# Altium PCB ProtoStack_Codec.PcbDoc
Units mm, origin at the board's own origin, x right, y up, seen from the top; angles counter-clockwise.
Board outline 39.67 x 122.17 mm, 2 copper layers (Top Layer, Bottom Layer); 79 components, 57 nets, 366 pads, 183 vias.
Unrouted connection lines stored in the file: 1.
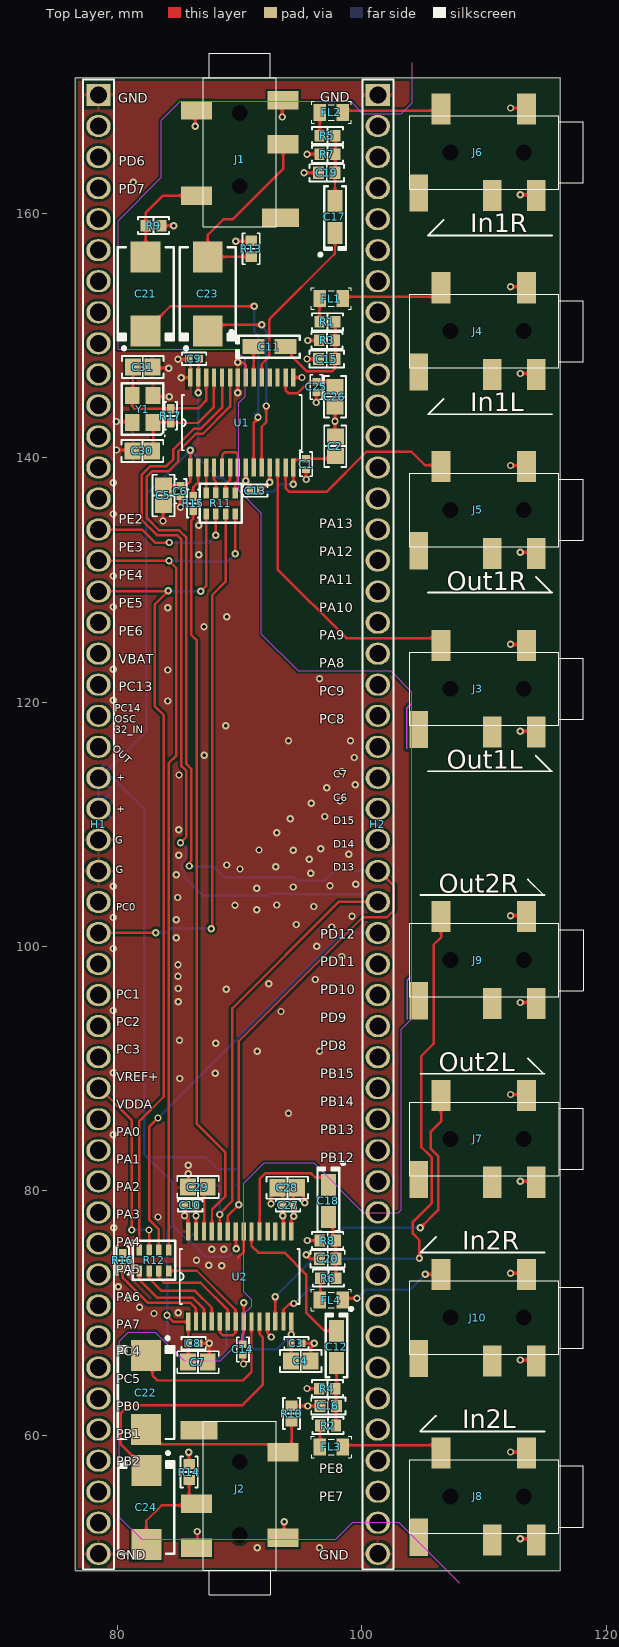
[diagram p0: Top Layer view]
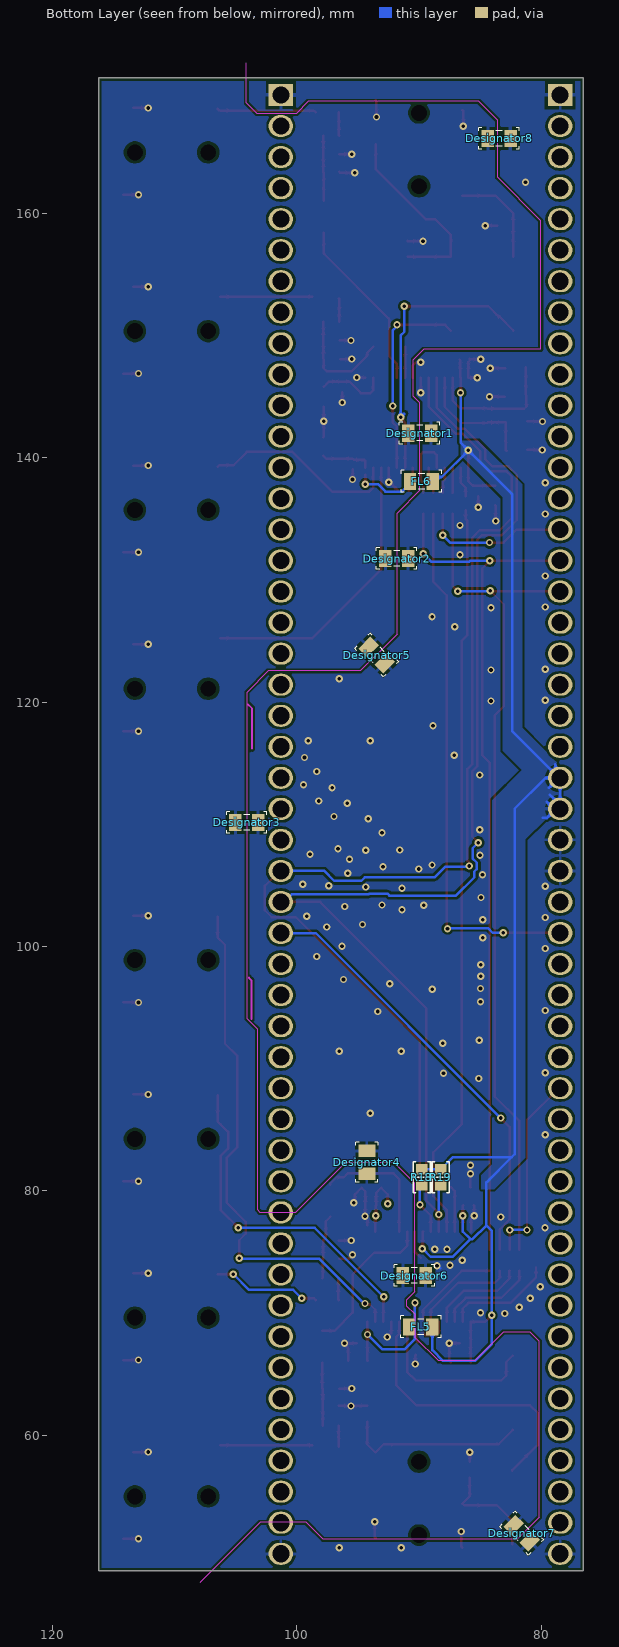
[diagram p1: Bottom Layer view, seen from below]

## Layer stack, top to bottom
Top Solder: solder mask 0.0102, Solder Resist, Dk 3.5
Top Layer: signal copper 0.0356
Dielectric 1: dielectric 0.32, FR-4, Dk 4.8
Bottom Layer: signal copper 0.0356
Bottom Solder: solder mask 0.0102, Solder Resist, Dk 3.5

## Board outline
76.54,48.914 76.54,171.086 116.205,171.086 116.205,48.914

## Design rules (kind name [scope] priority, off if disabled: settings)
BoardOutlineClearance [All] p1: gap=0.254 ignorepadtopadclearanceinfootprint=FALSE except(0: Arc-SplitContinuation Track-SplitContinuation SMDPad-SplitContinuation THPad-SplitContinuation Via-SplitContinuation Fill-SplitContinuation Poly-SplitContinuation Region-SplitContinuation Text-SplitContinuation)
Clearance [All] p1: gap=0.203 ignorepadtopadclearanceinfootprint=TRUE except(0.254: Arc-Hole Track-Hole SMDPad-Hole THPad-Via THPad-Hole Via-Via Via-Hole Fill-Hole Poly-Hole Region-Hole Text-Hole)
ComponentClearance [All] p1 off: gap=0.254 collisioncheckmode=3 verticalgap=0.254 showdistances=FALSE
PolygonConnect [All] p1: thpad.connectstyle=Relief thpad.reliefconductorwidth=0.254 thpad.reliefentries=4 thpad.polygonreliefangle="90 Angle" thpad.airgapwidth=0.254 smdpad.connectstyle=Relief smdpad.reliefconductorwidth=0.254 smdpad.reliefentries=4 smdpad.polygonreliefangle="90 Angle" smdpad.airgapwidth=0.254 via.connectstyle=Direct via.reliefconductorwidth=0.254 via.reliefentries=4 via.polygonreliefangle="90 Angle" via.airgapwidth=0.254
RoutingVias [All] p1: holewidth=0.3 width=0.6 viastyle="Through Hole" minholewidth=0.3 minwidth=0.6 maxholewidth=0.3 maxwidth=0.6
SilkToSilkClearance [All] p1 off: silktosilkclearance=0.254
SilkToSolderMaskClearance [IsPad] p1 off: minsilkscreentomaskgap=0.254 clearancetoexposedcopper=TRUE
SolderMaskExpansion [All] p1: expansion=0.102 istentingtop=FALSE
Width [All] p1: maxlimit=1.524 minlimit=0.203 preferedwidth=0.203
27 further rules are at their usual default settings.

## Classes and differential pairs
net class PowerNet: +3V3_CODEC
component class ProtoStack_Codec: C1 C2 C3 C4 C5 C6 C7 C8 C9 C10 C11 C12 C13 C14 C15 C16 C17 C18 C19 C20 C21 C22 C23 C24 C25 C26 C27 C28 C29 C30 C31 FL1 FL2 FL3 FL4 FL5 FL6 H1 H2 J1 J2 J3 J4 J5 J6 J7 J8 J9 J10 R1 R2 R3 R4 R5 R6 R7 R8 R9 R10 R11 R12 R13 R14 R15 R16 R17 R18 R19 U1 U2 Y1

## Components (designator, comment, footprint, x,y, rotation, side; value= is the part's Value field where it differs from the comment)
C1 "0.1µF" "CAP 0402_1005" 95.428,139.489 r90 top
C2 "10µF" "CAP 0805_2012" 97.815,140.957 r270 top
C3 "0.1µF" "CAP 0402_1005" 94.632,67.539 r180 top
C4 "10µF" "CAP 0805_2012" 94.992,66.091 r180 top
C5 "10µF" "CAP 0805_2012" 83.744,136.919 r90 top
C6 "0.1µF" "CAP 0402_1005" 85.141,137.279 r90 top
C7 "10µF" "CAP 0805_2012" 86.576,65.989 r180 top
C8 "0.1µF" "CAP 0402_1005" 86.216,67.539 r180 top
C9 "0.1µF" "CAP 0402_1005" 86.258,148.107 r180 top
C10 "0.1µF" "CAP 0402_1005" 85.945,78.816 r180 top
C11 "10µF" "CAP POL 1206_3216" 92.416,149.098 r0 top
C12 "10µF" "CAP POL 1206_3216" 97.917,67.248 r270 top
C13 "0.1µF" "CAP 0402_1005" 91.27,137.312 r180 top
C14 "0.1µF" "CAP 0402_1005" 90.246,67.031 r90 top
C15 "220pF" "CAP 0603_1608" 97.115,148.082 r0 top
C16 "220pF" "CAP 0603_1608" 97.241,62.408 r0 top
C17 "10µF" "CAP POL 1206_3216" 97.79,159.726 r90 top
C18 "10µF" "CAP POL 1206_3216" 97.257,79.186 r270 top
C19 "220pF" "CAP 0603_1608" 97.115,163.322 r0 top
C20 "220pF" "CAP 0603_1608" 97.191,74.447 r0 top
C21 "47µF" "CAP POL 2917_7343" 82.296,153.416 r90 top
C22 "47µF" "CAP POL 2917_7343" 82.321,63.502 r270 top
C23 "47µF" "CAP POL 2917_7343" 87.376,153.416 r90 top
C24 "47µF" "CAP POL 2917_7343" 82.347,54.1 r270 top
C25 "0.1µF" "CAP 0402_1005" 96.266,145.796 r270 top
C26 "10µF" "CAP 0805_2012" 97.79,144.996 r270 top
C27 "0.1µF" "CAP 0402_1005" 93.946,78.816 r0 top
C28 "10µF" "CAP 0805_2012" 93.891,80.264 r0 top
C29 "9pF" "CAP 0805_2012" 86.576,80.315 r180 top
C30 "9pF" "CAP 0805_2012" 82.029,140.564 r180 top
C31 "9pF" "CAP 0805_2012" 82.055,147.422 r0 top
Designator1 "Comment" 0805_IND 89.941,142.011 r180 bottom
Designator2 "Comment" 0805_IND 91.821,131.75 r180 bottom
Designator3 "Comment" 0805_IND 104.089,110.16 r180 bottom
Designator4 "Comment" 0805_IND 94.259,82.347 r270 bottom
Designator5 "Comment" 0805_IND 93.451,123.861 r45 bottom
Designator6 "Comment" 0805_IND 90.373,73.076 r180 bottom
Designator7 "Comment" 0805_IND 81.585,51.994 r225 bottom
Designator8 "Comment" 0805_IND 83.439,166.141 r0 bottom
FL1 "BLM21PG221SN1D" 0805_IND 97.485,153.035 r0 top
FL2 "BLM21PG221SN1D" 0805_IND 97.485,168.275 r0 top
FL3 "BLM21PG221SN1D" 0805_IND 97.485,59.055 r0 top
FL4 "BLM21PG221SN1D" 0805_IND 97.485,71.069 r0 top
FL5 "BLM21PG221SN1D" 0805_IND 89.84,68.885 r0 bottom
FL6 "BLM21PG221SN1D" 0805_IND 89.789,138.074 r0 bottom
H1 "RoundedHeader" HeaderDtack_48 78.439,169.691 r270 top
H2 "RoundedHeader" HeaderDtack_48 101.299,169.691 r270 top
J1 "" PJ_327 89.992,163.951 r270 top
J2 "" PJ_327 89.992,56.114 r90 top
J3 "" PJ_327 108.966,121.102 r180 top
J4 "" PJ_327 108.966,150.366 r180 top
J5 "" PJ_327 108.966,135.734 r180 top
J6 "" PJ_327 108.966,164.998 r180 top
J7 "" PJ_327 108.966,84.266 r180 top
J8 "" PJ_327 108.966,55.002 r180 top
J9 "" PJ_327 108.966,98.898 r180 top
J10 "" PJ_327 108.966,69.634 r180 top
R1 "5.6 kOhms" "RES 0603_1608" 97.17,151.13 r0 top
R2 "5.6 kOhms" "RES 0603_1608" 97.221,60.808 r0 top
R3 "5.6 kOhms" "RES 0603_1608" 97.14,149.606 r0 top
R4 "5.6 kOhms" "RES 0603_1608" 97.166,63.83 r0 top
R5 "5.6 kOhms" "RES 0603_1608" 97.17,166.37 r0 top
R6 "5.6 kOhms" "RES 0603_1608" 97.246,72.873 r0 top
R7 "5.6 kOhms" "RES 0603_1608" 97.17,164.846 r0 top
R8 "5.6 kOhms" "RES 0603_1608" 97.191,75.946 r0 top
R9 "47 kOhms" "RES 0603_1608" 82.946,159.004 r0 top
R10 "47 kOhms" "RES 0603_1608" 94.234,61.783 r90 top
R11 "YC164-JR-0733RL" "RESNET 1206-8 CONVEX" 88.443,136.271 r90 top
R12 "YC164-JR-0733RL" "RESNET 1206-8 CONVEX" 82.982,74.32 r270 top
R13 "47 kOhms" "RES 0603_1608" 90.932,157.114 r90 top
R14 "47 kOhms" "RES 0603_1608" 85.852,56.998 r90 top
R15 "100 Ohms" "RES 0402_1005" 86.182,136.271 r270 top
R16 "100 Ohms" "RES 0402_1005" 80.416,74.32 r90 top
R17 "100 Ohms" "RES 0402_1005" 84.353,143.434 r90 top
R18 "5.6 kOhms" "RES 0603_1608" 89.764,81.128 r270 bottom
R19 "5.6 kOhms" "RES 0603_1608" 88.214,81.128 r270 bottom
U1 "WM8731" TSSOP-28 90.17,142.875 r90 top
U2 "WM8731" TSSOP-28 89.992,73 r90 top
Y1 "24.576MHz" "ABRACON ABM8G" 82.051,143.993 r90 top

## Footprints (in the part's own frame and the unit in brackets; to place one, negate y for a bottom-side part, rotate by r counter-clockwise, add the part's x,y. Pads: shape width x height; smd on the part's side, far side on the other; paste and mask are expansions set on the pad)
0805_IND [mil]
  rect 40x55 smd: 1(-37,0) 2(37,0)
  silkscreen extent -65,-35 65,35, body extent -39,-21 39,21, height 49
"ABRACON ABM8G" [mm] "Crystal, 4-Leads, Body 2.50x3.20mm, Pitch 2.20mm, IPC Medium Density"
  rect 1.4x1.2 smd: 1(-1.1,-0.85) 2(1.1,-0.85) 3(1.1,0.85) 4(-1.1,0.85)
  silkscreen extent -2.25,-1.85 2.1,1.7, body extent -1.61,-1.26 1.61,1.26, height 0.6
"CAP 0402_1005" [mm] "Chip Capacitor, 2-Leads, Body 1.02x0.51mm, IPC Medium Density"
  rect 0.6x0.64 smd: 1(-0.44,0) 2(0.44,0)
  silkscreen extent -1,-0.5 1,0.5, body extent -0.5,-0.26 0.5,0.26, height 0.52
"CAP 0603_1608" [mm] "Chip Capacitor, 2-Leads, Body 1.60x0.80mm, IPC Medium Density"
  rect 0.9x1 smd: 1(-0.675,0) 2(0.675,0)
  silkscreen extent -1.4,-0.7 1.4,0.7, body extent -0.8,-0.41 0.8,0.41, height 0.82
"CAP 0805_2012" [mm] "Chip Capacitor, 2-Leads, Body 2.00x1.20mm, IPC Medium Density"
  rect 1.3x1.4 smd: 1(-0.8,0) 2(0.8,0)
  silkscreen extent -1.7,-0.9 1.7,0.9, body extent -1,-0.64 1,0.64, height 1.26
"CAP POL 1206_3216" [mm] "Molded Capacitor, 2-Leads, Body 3.20x1.6mm, IPC Medium Density"
  rect 1.8x1.23 smd: 1(-1.31,0) 2(1.31,0)
  silkscreen extent -3.22,-0.9 2.5,1.32, body extent -1.72,-0.85 1.71,0.85, height 1.7
"CAP POL 2917_7343" [mm] "Molded Capacitor, 2-Leads, Body 7.30x4.30mm, IPC Medium Density"
  rect 2.55x2.45 smd: 1(-3.025,0) 2(3.025,0)
  silkscreen extent -4.57,-2.3 3.8,2.3, body extent -3.65,-2.15 3.65,2.15, height 4.1
HeaderDtack_48 [mm]
  rect 1.8x2 hole 1.4: 1(0,0)
  oval 1.8x2 hole 1.4: 2(2.54,0) 3(5.08,0) 4(7.62,0) 5(10.16,0) 6(12.7,0) 7(15.24,0) 8(17.78,0) 9(20.32,0) 10(22.86,0) 11(25.4,0) 12(27.94,0) 13(30.48,0) 14(33.02,0) 15(35.56,0) 16(38.1,0) 17(40.64,0) 18(43.18,0) 19(45.72,0) 20(48.26,0) 21(50.8,0) 22(53.34,0) 23(55.88,0) 24(58.42,0) 25(60.96,0) 26(63.5,0) 27(66.04,0) 28(68.58,0) 29(71.12,0) 30(73.66,0) 31(76.2,0) 32(78.74,0) 33(81.28,0) 34(83.82,0) 35(86.36,0) 36(88.9,0) 37(91.44,0) 38(93.98,0) 39(96.52,0) 40(99.06,0) 41(101.6,0) 42(104.14,0) 43(106.68,0) 44(109.22,0) 45(111.76,0) 46(114.3,0) 47(116.84,0) 48(119.38,0)
  silkscreen extent -1.27,-1.27 120.65,1.27
PJ_327 [mil]
  rect 60x100 smd mask+3: 2(98.43,-139.76) 3(-177.17,-139.76) 4(-208.66,139.76) 5(-66.93,139.76)
  rect 60x120 smd mask+3: 6(170,131.34)
  round 0 hole 51 unplated mask+3: 257(-168.22,0) 258(68,0)
  silkscreen extent -360,-118 199,118, body extent -374,-177 374,177, height 201
"RES 0402_1005" [mm] "Chip Resistor, 2-Leads, Body 1.0x0.5mm, IPC Medium Density"
  rect 0.75x0.6 smd: 1(-0.575,0) 2(0.575,0)
  silkscreen extent -1.14,-0.51 1.14,0.51, body extent -0.5,-0.25 0.5,0.25, height 0.35
"RES 0603_1608" [mm] "Chip Resistor, 2-Leads, Body 1.60x0.80mm, IPC Medium Density"
  rect 0.85x0.95 smd: 1(-0.65,0) 2(0.65,0)
  silkscreen extent -1.27,-0.7 1.27,0.7, body extent -0.8,-0.4 0.8,0.4, height 0.45
"RESNET 1206-8 CONVEX" [mm] "4 resistor 3.20x1.60mm, 0.7mm high"
  rect 0.9x0.45 smd: 1(-0.85,1.2) 2(-0.85,0.4) 3(-0.85,-0.4) 4(-0.85,-1.2) 5(0.85,-1.2) 6(0.85,-0.4) 7(0.85,0.4) 8(0.85,1.2)
  silkscreen extent -1.6,-1.73 1.6,1.73, body extent -0.84,-1.62 0.84,1.63, height 0.71
TSSOP-28 [mil]
  rect 58x14 smd mask+2.36: 1(-145,166) 2(-145,141) 3(-145,115) 4(-145,90) 5(-145,64) 6(-145,38) 7(-145,13) 8(-145,-13) 9(-145,-38) 10(-145,-64) 11(-145,-90) 12(-145,-115) 13(-145,-141) 14(-145,-166) 15(145,-166) 16(145,-141) 17(145,-115) 18(145,-90) 19(145,-64) 20(145,-38) 21(145,-13) 22(145,13) 23(145,38) 24(145,64) 25(145,90) 26(145,115) 27(145,141) 28(145,166)
  silkscreen extent -89,-193 89,193, body extent -127,-177 127,177, height 44

## Part data
C1 C3 C6 C8 C9 C10 C13 C14 C25 C27: library part C0402C104K4RACAUTO, "CAP CER 0.1UF 16V X7R 0402", Device Package="0402 (1005 Metric)", Manufacturer=KEMET, Operating Temperature="-55°C ~ 125°C", Ratings=AEC-Q200, Supplier Part Number 1=399-6828-1-ND, Temperature Coefficient=X7R, Tolerance=±10%, Voltage - Rated=16V, Applications="Automotive, Bypass, Decoupling", Capacitance=0.1µF, ComponentLink1Description=Datasheet, ComponentLink1URL=https://api.kemet.com/component-edge/download/specsheet/C0402C104K4RACAUTO.pdf, ComponentLink2Description="DigiKey Link", ComponentLink2URL=http://digikey.com/product-detail/en/kemet/C0402C104K4RACAUTO/399-6828-1-ND/3314343, LastUpdated="9/2/2020 1:02:21 AM", Lifecycle Status=Active, Minimum Order=1, Mounting Type="Surface Mount, MLCC", Package / Case="0402 (1005 Metric)", Packaging=TapeAndReel, Part Number=C0402C104K4RACAUTO, Part Status=Active, PartId=3024, Price=0.01, Series="SMD Auto X7R", Size / Dimension="0.039\" L x 0.020\" W (1.00mm x 0.50mm)", Supplier 1=DigiKey, Thickness (Max)="0.022\" (0.55mm)"
C2 C4 C5 C7 C26 C28: library part C0805C106K8PACTU, "CAP CER 10UF 10V X5R 0805", Device Package="0805 (2012 Metric)", Manufacturer=KEMET, Operating Temperature="-55°C ~ 85°C", Supplier Part Number 1=399-4925-1-ND, Temperature Coefficient=X5R, Tolerance=±10%, Voltage - Rated=10V, Applications="General Purpose", Capacitance=10µF, ComponentLink1Description=Datasheet, ComponentLink1URL=https://api.kemet.com/component-edge/download/datasheet/C0805C106K8PACTU.pdf, ComponentLink2Description="DigiKey Link", ComponentLink2URL=http://digikey.com/product-detail/en/kemet/C0805C106K8PACTU/399-4925-1-ND/1090920, LastUpdated="9/2/2020 1:04:14 AM", Lifecycle Status=Active, Minimum Order=1, Mounting Type="Surface Mount, MLCC", Package / Case="0805 (2012 Metric)", Packaging=TapeAndReel, Part Number=C0805C106K8PACTU, Part Status=Active, PartId=15978, Price=0.03, Series="SMD Comm X5R", Size / Dimension="0.079\" L x 0.049\" W (2.00mm x 1.25mm)", Supplier 1=DigiKey, Thickness (Max)="0.055\" (1.40mm)"
C11 C12 C17 C18: library part T491A106K010AT, "CAP TANT 10UF 10% 10V 1206", Device Package="1206 (3216 Metric)", ESR (Equivalent Series Resistance)=3.8Ohm, Lifetime @ Temp.="2000 Hrs @ 125°C", Manufacturer=KEMET, Manufacturer Size Code=A, Operating Temperature="-55°C ~ 125°C", Supplier Part Number 1=399-3684-1-ND, Tolerance=±10%, Voltage - Rated=10V, Capacitance=10µF, ComponentLink1Description=Datasheet, ComponentLink1URL=https://api.kemet.com/component-edge/download/datasheet/T491A106K010AT.pdf, ComponentLink2Description="DigiKey Link", ComponentLink2URL=http://digikey.com/product-detail/en/kemet/T491A106K010AT/399-3684-1-ND/819009, Features="General Purpose", Height - Seated (Max)="0.071\" (1.80mm)", LastUpdated="9/2/2020 1:15:58 AM", Lifecycle Status=Active, Minimum Order=1, Mounting Type="Surface Mount", Package / Case="1206 (3216 Metric)", Packaging=TapeAndReel, Part Number=T491A106K010AT, Part Status=Active, PartId=330, Price=0.07, Series=T491, Size / Dimension="0.126\" L x 0.063\" W (3.20mm x 1.60mm)", Supplier 1=DigiKey, Type=Molded
C15 C16 C19 C20: library part C0603C221K5RACTU, "CAP CER 220PF 50V X7R 0603", Device Package="0603 (1608 Metric)", Manufacturer=KEMET, Operating Temperature="-55°C ~ 125°C", Supplier Part Number 1=399-1071-1-ND, Temperature Coefficient=X7R, Tolerance=±10%, Voltage - Rated=50V, Applications="Bypass, Decoupling", Capacitance=220pF, ComponentLink1Description=Datasheet, ComponentLink1URL=https://api.kemet.com/component-edge/download/datasheet/C0603C221K5RACTU.pdf, ComponentLink2Description="DigiKey Link", ComponentLink2URL=http://digikey.com/product-detail/en/kemet/C0603C221K5RACTU/399-1071-1-ND/411346, LastUpdated="9/2/2020 1:03:33 AM", Lifecycle Status=Active, Minimum Order=1, Mounting Type="Surface Mount, MLCC", Package / Case="0603 (1608 Metric)", Packaging=TapeAndReel, Part Number=C0603C221K5RACTU, Part Status=Active, PartId=3639, Price=0.01, Series="SMD Comm X7R", Size / Dimension="0.063\" L x 0.031\" W (1.60mm x 0.80mm)", Supplier 1=DigiKey, Thickness (Max)="0.034\" (0.87mm)"
C21 C22 C23 C24: library part 293D476X9010D2TE3, "CAP TANT 47UF 10% 10V 2917", Device Package="2917 (7343 Metric)", ESR (Equivalent Series Resistance)=700mOhm, Manufacturer="Vishay Sprague", Manufacturer Size Code=D, Operating Temperature="-55°C ~ 125°C", Supplier Part Number 1=718-1088-1-ND, Tolerance=±10%, Voltage - Rated=10V, Capacitance=47µF, ComponentLink1Description=Datasheet, ComponentLink1URL=http://www.vishay.com/docs/40002/293d.pdf, ComponentLink2Description="DigiKey Link", ComponentLink2URL=http://digikey.com/product-detail/en/vishay-sprague/293D476X9010D2TE3/718-1088-1-ND/1559582, Features="General Purpose", Height - Seated (Max)="0.122\" (3.10mm)", LastUpdated="9/2/2020 1:16:14 AM", Lifecycle Status=Active, Minimum Order=1, Mounting Type="Surface Mount", Package / Case="2917 (7343 Metric)", Packaging=TapeAndReel, Part Number=293D476X9010D2TE3, Part Status=Active, PartId=2778, Price=0.22, Series="TANTAMOUNT®, 293D", Size / Dimension="0.287\" L x 0.169\" W (7.30mm x 4.30mm)", Supplier 1=DigiKey, Type=Molded
C29 C30 C31: library part CBR08C909CAGAC, "CAP CER 9PF 250V C0G/NP0 0805", Device Package="0805 (2012 Metric)", Manufacturer=KEMET, Operating Temperature="-55°C ~ 125°C", Supplier Part Number 1=399-8711-1-ND, Temperature Coefficient="C0G, NP0", Tolerance=±0.25pF, Voltage - Rated=250V, Applications="RF, Microwave, High Frequency", Capacitance=9pF, ComponentLink1Description=Datasheet, ComponentLink1URL=https://api.kemet.com/component-edge/download/datasheet/CBR08C909CAGAC.pdf, ComponentLink2Description="DigiKey Link", ComponentLink2URL=http://digikey.com/product-detail/en/kemet/CBR08C909CAGAC/399-8711-1-ND/3480335, Features="High Q, Low Loss, Ultra Low ESR", LastUpdated="9/2/2020 1:04:31 AM", Lifecycle Status=Active, Minimum Order=1, Mounting Type="Surface Mount, MLCC", Package / Case="0805 (2012 Metric)", Packaging=TapeAndReel, Part Number=CBR08C909CAGAC, Part Status=Active, PartId=8592, Price=0.28, Series="CBR-SMD RF C0G", Size / Dimension="0.079\" L x 0.049\" W (2.00mm x 1.25mm)", Supplier 1=DigiKey, Thickness (Max)="0.035\" (0.88mm)"
FL1 FL2 FL3 FL4 FL5 FL6: "ACM Series 0805 360 Ohm 220mA 500 mOhm DCR 50 V SMT Common Mode Filter"
H1 H2: library part HeaderStack_48
J1 J2 J3 J4 J5 J6 J7 J8 J9 J10: library part "3.5mm jack stereo smd", "Conn 3.5MM Stereo Jack F 3 POS Solder RA SMD 3 Terminal 1 Port T/R", Package=None, Availability=Good, MF=Switchcraft, MP=35RASMT2BHNTRX, Price="0.84 USD", SnapEDA_Link=https://www.snapeda.com/parts/35RASMT2BHNTRX/Switchcraft%20Inc./view-part/?ref=snap
R1 R2 R3 R4 R5 R6 R7 R8 R18 R19: library part RT0603DRE075K6L, "RES SMD 5.6K OHM 0.5% 1/10W 0603", Device Package="0603 (1608 Metric)", Manufacturer=Yageo, Operating Temperature="-55°C ~ 155°C", Power (Watts)="0.1W, 1/10W", Supplier Device Package=0603, Supplier Part Number 1=311-2635-1-ND, Temperature Coefficient=±50ppm/°C, Tolerance=±0.5%, ComponentLink1Description=Datasheet, ComponentLink1URL=https://www.yageo.com/upload/media/product/productsearch/datasheet/rchip/PYu-RT_1-to-0.01_RoHS_L_11.pdf, ComponentLink2Description="DigiKey Link", ComponentLink2URL=http://digikey.com/product-detail/en/yageo/RT0603DRE075K6L/311-2635-1-ND/6129054, Composition="Thin Film", Height - Seated (Max)="0.022\" (0.55mm)", LastUpdated="9/2/2020 1:10:05 AM", Lifecycle Status=Active, Minimum Order=1, Number of Terminations=2, Package / Case="0603 (1608 Metric)", Packaging=TapeAndReel, Part Number=RT0603DRE075K6L, Part Status=Active, PartId=14197, Price=0.01, Resistance="5.6 kOhms", Series=RT, Size / Dimension="0.063\" L x 0.031\" W (1.60mm x 0.80mm)", Supplier 1=DigiKey
R9 R10 R13 R14: library part RT0603FRE0747KL, "RES SMD 47K OHM 1% 1/10W 0603", Device Package="0603 (1608 Metric)", Manufacturer=Yageo, Operating Temperature="-55°C ~ 155°C", Power (Watts)="0.1W, 1/10W", Supplier Device Package=0603, Supplier Part Number 1=YAG3355CT-ND, Temperature Coefficient=±50ppm/°C, Tolerance=±1%, ComponentLink1Description=Datasheet, ComponentLink1URL=https://www.yageo.com/upload/media/product/productsearch/datasheet/rchip/PYu-RT_1-to-0.01_RoHS_L_11.pdf, ComponentLink2Description="DigiKey Link", ComponentLink2URL=http://digikey.com/product-detail/en/yageo/RT0603FRE0747KL/YAG3355CT-ND/5418060, Composition="Thin Film", Height - Seated (Max)="0.022\" (0.55mm)", LastUpdated="9/2/2020 1:10:23 AM", Lifecycle Status=Active, Minimum Order=1, Number of Terminations=2, Package / Case="0603 (1608 Metric)", Packaging=TapeAndReel, Part Number=RT0603FRE0747KL, Part Status=Active, PartId=5674, Price=0.01, Resistance="47 kOhms", Series=RT, Size / Dimension="0.063\" L x 0.031\" W (1.60mm x 0.80mm)", Supplier 1=DigiKey
R11 R12: "RES ARRAY 4 RES 33 OHM 1206", Manufacturer=Yageo, Number of Resistors=4, Operating Temperature="-55°C ~ 155°C", Package / Case="1206 (3216 Metric), Convex, Long Side Terminals", Power Per Element=62.5mW, Resistance (Ohms)=33, Supplier Part Number 1=YC164J-33CT-ND, Temperature Coefficient=±200ppm/°C, Tolerance=±5%, Applications="DDRAM, SDRAM", Circuit Type=Isolated, ComponentLink1Description=Datasheet, ComponentLink1URL=https://www.yageo.com/upload/media/product/productsearch/datasheet/rchip/PYu-YC_TC_group_51_RoHS_L_9.pdf, ComponentLink2Description="DigiKey Link", ComponentLink2URL=http://digikey.com/product-detail/en/yageo/YC164-JR-0733RL/YC164J-33CT-ND/1005642, Height - Seated (Max)="0.028\" (0.70mm)", LastUpdated="9/2/2020 1:23:24 AM", Lifecycle Status=Active, Minimum Order=1, Mounting Type="Surface Mount", Number of Pins=8, Packaging=TapeAndReel, Part Number=YC164-JR-0733RL, Part Status=Active, PartId=145, Price=0.01, Series=YC164, Size / Dimension="0.126\" L x 0.063\" W (3.20mm x 1.60mm)", Supplier 1=DigiKey
R15 R16 R17: library part RT0402FRE07100RL, "RES SMD 100 OHM 1% 1/16W 0402", Device Package="0402 (1005 Metric)", Manufacturer=Yageo, Operating Temperature="-55°C ~ 155°C", Power (Watts)="0.063W, 1/16W", Supplier Device Package=0402, Supplier Part Number 1=YAG3342CT-ND, Temperature Coefficient=±50ppm/°C, Tolerance=±1%, ComponentLink1Description=Datasheet, ComponentLink1URL=https://www.yageo.com/upload/media/product/productsearch/datasheet/rchip/PYu-RT_1-to-0.01_RoHS_L_11.pdf, ComponentLink2Description="DigiKey Link", ComponentLink2URL=http://digikey.com/product-detail/en/yageo/RT0402FRE07100RL/YAG3342CT-ND/5418047, Composition="Thin Film", Height - Seated (Max)="0.014\" (0.35mm)", LastUpdated="9/2/2020 1:08:09 AM", Lifecycle Status=Active, Minimum Order=1, Number of Terminations=2, Package / Case="0402 (1005 Metric)", Packaging=TapeAndReel, Part Number=RT0402FRE07100RL, Part Status=Active, PartId=3193, Price=0.01, Resistance="100 Ohms", Series=RT, Size / Dimension="0.039\" L x 0.020\" W (1.00mm x 0.50mm)", Supplier 1=DigiKey
U1 U2: "Stero in/ot audio codec"
Y1: library part ABM8G-24.576MHZ-B4Y-T, "CRYSTAL 24.5760MHZ 10PF SMD", Device Package="4-SMD, No Lead", ESR (Equivalent Series Resistance)="60 Ohms", Frequency Stability=±30ppm, Load Capacitance=10pF, Manufacturer="Abracon LLC", Operating Mode=Fundamental, Operating Temperature="-20°C ~ 70°C", Supplier Part Number 1=535-10296-1-ND, ComponentLink1Description=Datasheet, ComponentLink1URL=https://abracon.com/Resonators/ABM8G.pdf, ComponentLink2Description="DigiKey Link", ComponentLink2URL=http://digikey.com/product-detail/en/abracon-llc/ABM8G-24.576MHZ-B4Y-T/535-10296-1-ND/2218109, Frequency=24.576MHz, Frequency Tolerance=±30ppm, Height - Seated (Max)="0.039\" (1.00mm)", LastUpdated="3/19/2020 10:36:25 PM", Lifecycle Status=Active, Minimum Order=1, Mounting Type="Surface Mount", Package / Case="4-SMD, No Lead", Packaging=TapeAndReel, Part Number=ABM8G-24.576MHZ-B4Y-T, Part Status=Active, PartId=297, Price=0.50, Series=ABM8G, Size / Dimension="0.126\" L x 0.098\" W (3.20mm x 2.50mm)", Supplier 1=DigiKey, Type="MHz Crystal"

## Via types
v1: diameter 0.6, hole 0.3, Top Layer to Bottom Layer, tented both sides, 183 vias

## Nets (pads, with @x,y where several pads share a name; then routed paths per layer and width w, separated by ;. In a path a pad name is that pad's centre, name@x,y a point inside that pad or via, vN(x,y) a via of type N, cw(c..) or ccw(c..) an arc to the next point about the centre after c; other vN are vias at no path point)
+3V3_CODEC: C1.2 C2.2 C3.2 C4.2 C13.2 C14.2 FL5.2 FL6.2 U1.8 U1.14 U2.8 U2.14 | length 25.7
  Top Layer w0.203: C14.2@90.094,67.64 90.195,67.742 90.195,68.25 90.322,68.377 90.322,69.312 U2.8@90.327,69.312 ; U2.8 v1(90.322,70.841) ; U1.8@90.487,139.205 U1.8 v1(90.5,138.125) 90.807,137.818 90.807,137.336 C13.2 ; C4.2 94.209,66.107 v1(94.209,68.25) U2.14 ; v1(94.386,137.846) U1.14@94.386,138.633 ; U1.14 94.386,139.751 94.463,139.827 95.326,139.827 C1.2 97.587,139.929 C2.2
  Bottom Layer w0.203: v1(90.322,70.841) 90.322,67.894 91.186,67.031 92.989,67.031 v1(94.209,68.25) ; v1(90.5,138.125) 91.389,137.236 92.735,137.236 93.345,137.846 v1(94.386,137.846)
+3V3_D: C5.2 C6.2 C7.2 C8.2 C9.1 C10.1 FL5.1 FL6.1 H1.23 H1.24 R18.1 R19.1 U1.1 U1.27 U2.1 U2.22 U2.27 | length 138.2
  Top Layer w0.203: C5.2 C6.2 85.598,137.719 85.954,138.074 U1.1 v1(85.954,140.614) ; v1(84.049,69.825) 84.582,69.291 85.7,69.291 85.725,69.317 U2.1 C8.2 C7.2 ; C10.1 86.398,78.803 86.398,77.991 v1(86.411,77.978) U2.27 ; v1(86.589,145.313) U1.27 86.627,146.596 86.627,147.993 C9.1@86.665,148.031 ; U2.22 89.687,76.657 89.687,75.311 v1(89.713,75.286)
  Bottom Layer w0.203: 78.84,114.935 78.84,114.212 H1.23 ; 79.273,112.42 79.132,112.279 79.121,112.279 H1.24@78.439,111.597 ; 79.362,112.988 H1.23@78.539,113.811 ; 79.547,111.853 78.965,111.271 H1.24@78.783,111.271 ; 79.858,110.541 79.513,110.541 H1.24@78.783,111.271 ; v1(86.411,77.978) 86.411,76.683 85.784,76.056 ; v1(86.589,145.313) 86.589,141.249 v1(85.954,140.614) ; FL6.1 88.511,138.413 88.155,138.413 v1(85.954,140.614) ; FL5.1 88.9,66.98 88.011,66.091 85.395,66.091 84.049,67.437 v1(84.049,69.825) 84.049,76.759 84.48,77.191 ; v1(89.713,75.286) 89.027,74.6 87.24,74.6 85.784,76.056 ; R18.1 R19.1 87.213,82.779 82.398,82.779 ; H1.24@78.439,111.597 H1.23 ; H1.24@78.439,111.597 H1.24 H1.24@78.783,111.271 ; H1.23 H1.23@78.539,113.811 ; H1.23@78.539,113.811 82.347,117.619 82.347,137.008 v1(85.954,140.614) ; H1.23@78.539,113.811 79.636,113.811 82.169,111.277 82.169,83.007 82.398,82.779 ; 82.398,82.779 84.48,80.696 84.48,77.191 ; 84.48,77.191 85.615,76.056 85.784,76.056
GND: C5.1 C6.1 C7.1 C8.1 C9.2 C10.2 C29.2 C30.2 C31.2 Designator1.2 Designator2.2 Designator3.2 Designator4.1 Designator5.1 Designator6.2 Designator7.2 Designator8.1 H1.1 H1.25 H1.26 H1.48 H2.1 H2.48 U1.21 U1.22 U1.28 U2.21 U2.28 Y1.2 Y1.4 | length 22.4
  Top Layer w0.203: v1(79.881,142.975) Y1.4@81.119,142.975 ; v1(79.91,140.646) C30.2@81.147,140.646 ; C31.2@82.937,147.339 v1(84.174,147.339) ; Y1.2@82.983,145.01 v1(84.22,145.01) ; v1(83.718,134.823) 83.718,136.093 C5.1 ; v1(84.938,148.057) 85.768,148.057 C9.2 ; v1(85.141,135.966) C6.1 ; v1(85.217,146.558) U1.28 85.954,147.862 C9.2@85.785,148.031 ; C10.2 85.488,78.799 85.488,77.995 v1(85.471,77.978) 85.725,77.724 85.725,76.733 U2.28 ; C29.2 85.783,80.321 v1(85.783,81.408) ; C8.1 v1(87.503,67.539) 87.503,66.116 C7.1 ; v1(89.84,145.313) U1.22 ; v1(89.84,147.828) 89.874,147.794 90.255,147.794 90.5,147.549 U1.21 ; 89.865,74.549 90.322,75.006 U2.21 ; v1@91.542,107.899 v1(91.567,107.899) ; v1(92.939,106.528) 92.964,106.553 v1@92.989,106.553 ; v1@93.015,103.378 v1(93.015,103.403) ; v1(93.015,109.322) v1@93.04,109.296 ; v1@94.336,104.877 v1(94.361,104.877) ; v1(94.361,107.874) v1@94.361,107.899 ; v1(96.291,100.025) 96.342,100.076 v1@96.52,100.076 ; v1(96.622,108.001) v1@96.647,108.001 ; v1(97.536,101.6) v1@97.561,101.6
  Bottom Layer w0.203: 88.265,73.66 88.494,73.889 v1(88.519,73.889) ; v1@97.307,105.029 97.333,105.029 v1(97.384,104.978)
  other v1: 91.44,50.8 96.52,50.8 82.982,69.977 84.963,70.028 81.788,70.485 80.899,71.222 80.061,72.161 87.452,73.914 86.462,74.32 87.706,75.235 88.697,75.235 79.68,76.987 83.312,77.876 85.776,82.093 79.654,84.607 93.98,86.36 85.095,89.205 87.986,89.637 79.654,89.687 91.44,91.44 96.52,91.44 88.036,92.1 85.065,92.329 93.37,94.691 79.654,94.767 84.963,95.479 88.9,96.52 84.963,96.571 92.38,96.952 96.164,97.307 84.938,97.561 84.938,98.501 98.349,99.187 79.654,99.847 84.787,100.736 94.615,101.803 84.787,102.184 79.654,102.387 99.187,102.489 91.389,103.022 96.063,103.276 89.611,103.378 84.912,104.013 91.389,104.775 79.654,104.927 99.492,105.105 84.791,105.885 95.809,105.994 90.018,106.35 88.921,106.68 95.682,107.137 84.993,107.467 98.908,107.569 85.014,109.55 94.132,110.465 96.952,110.642 95.86,111.735 98.196,111.912 97.104,113.005 99.441,113.233 85.019,114.046 98.349,114.325 99.365,115.468 87.097,115.646 93.98,116.84 99.06,116.84 88.849,118.085 84.096,120.098 79.654,120.167 96.52,121.92 84.096,122.638 79.654,122.707 87.071,126.162 88.921,127 84.096,127.718 79.654,127.787 79.654,130.327 86.635,132.08 86.638,134.468 79.654,135.407 79.654,137.947 81.28,162.56
GND_A: C1.1 C2.1 C3.1 C4.1 C13.1 C14.1 C15.1 C16.1 C19.1 C20.1 C25.2 C26.2 C27.2 C28.2 Designator1.1 Designator2.1 Designator3.1 Designator4.2 Designator5.2 Designator6.1 Designator7.1 Designator8.2 J1.3 J1.4 J2.3 J2.4 J3.3 J3.4 J4.3 J4.4 J5.3 J5.4 J6.3 J6.4 J7.3 J7.4 J8.3 J8.4 J9.3 J9.4 J10.3 J10.4 R3.1 R4.1 R7.1 R8.1 R9.2 R10.2 R13.2 R14.2 U1.11 U1.15 U2.11 U2.15 | length 54.8
  Top Layer w0.203: R9.2 v1(84.582,159.004) ; v1(85.827,58.623) 85.827,57.851 R14.2@85.852,57.825 ; v1(86.36,167.132) 86.36,168.369 J1.3 ; J2.4 86.524,50.896 v1(86.524,52.134) ; v1(89.662,157.734) 90.902,157.734 R13.2 ; C14.1 90.297,66.54 v1(90.297,65.837) ; C13.1 91.71,137.332 92.376,137.998 v1(92.456,137.998) U1.11 ; U2.11 92.278,68.377 92.583,68.072 v1(92.583,68.047) ; v1(93.472,167.894) 93.472,169.181 J1.4 ; J2.3 93.624,51.696 v1(93.624,52.934) ; U2.15@94.209,77.191 94.209,77.625 94.412,77.828 v1(94.412,77.927) 94.399,77.94 94.399,78.803 C27.2 94.386,79.959 C28.2 95.239,79.716 95.239,79.239 95.326,79.152 v1(95.326,79.045) ; R10.2 94.259,62.408 v1(95.55,62.408) C16.1 ; U1.15 94.463,146.571 v1(95.086,146.571) ; C3.1 v1(96.088,67.539) 96.088,67.431 95.792,67.135 C4.1 ; v1(95.25,163.322) C19.1 C19.1@96.52,163.402 ; v1(95.428,74.778) 95.431,74.778 95.761,74.447 C20.1 ; v1(95.428,138.227) C1.1 ; v1(95.5,63.83) R4.1 ; v1(95.504,148.082) C15.1 ; v1(95.504,164.846) R7.1 ; v1(95.525,75.946) R8.1 ; v1(95.554,149.606) R3.1 ; v1(96.266,144.526) C25.2 ; C26.2 v1(97.79,143.002) 97.79,141.707 C2.1@97.815,141.681 ; v1(112.147,58.634) J8.3@113.384,58.634 ; v1(112.147,73.266) J10.3@113.384,73.266 ; v1(112.147,87.898) J7.3@113.384,87.898 ; v1(112.147,102.531) J9.3@113.384,102.531 ; v1(112.147,124.734) J3.3@113.384,124.734 ; v1(112.147,139.366) J5.3@113.384,139.366 ; v1(112.147,153.998) J4.3@113.384,153.998 ; v1(112.147,168.631) J6.3@113.384,168.631 ; v1(112.947,51.534) J8.4@114.184,51.534 ; v1(112.947,66.166) J10.4@114.184,66.166 ; v1(112.947,80.798) J7.4@114.184,80.798 ; v1(112.947,95.431) J9.4@114.184,95.431 ; v1(112.947,117.634) J3.4@114.184,117.634 ; v1(112.947,132.266) J5.4@114.184,132.266 ; v1(112.947,146.898) J4.4@114.184,146.898 ; v1(112.947,161.531) J6.4@114.184,161.531
I2C4_SCL: H2.27 R19.2 U1.24 U2.24 | length 101.3
  Top Layer w0.203: v1(85.141,108.509) 85.623,108.991 85.623,114.368 85.217,114.774 85.217,133.299 84.847,133.669 83.213,133.669 81.991,134.891 81.991,138.624 82.661,139.294 83.972,139.294 84.557,139.878 84.557,140.691 86.228,142.362 86.797,142.362 88.544,144.11 U1.24 ; U2.24 v1(88.367,78.08) 88.367,78.173 89.383,79.189 89.383,94.945 98.088,103.651 H2.27
  Bottom Layer w0.203: v1(85.141,108.509) 85.598,108.052 85.598,107.217 85.263,106.882 85.263,106.344 85.471,106.136 85.471,105.664 86.965,104.17 92.41,104.17 92.583,104.343 94.039,104.343 94.11,104.272 100.403,104.272 101.024,103.651 H2.27 ; R19.2@88.163,80.427 R19.2 88.367,80.325 v1(88.367,78.08)
I2C4_SDA: H2.26 R18.2 U1.23 U2.23 | length 101.3
  Top Layer w0.203: v1(85.868,106.595) 85.903,106.629 85.903,106.918 86.03,107.045 86.03,114.536 85.623,114.943 85.623,133.477 85.025,134.076 83.382,134.076 82.398,135.059 82.398,138.455 82.829,138.887 84.141,138.887 84.963,139.709 84.963,140.522 86.397,141.956 86.965,141.956 89.205,144.196 U1.23 ; U2.23 89.027,77.978 v1(89.916,78.867) 89.916,92.253 100.063,102.4 102.044,102.4 102.616,102.972 102.616,104.973 101.399,106.191 H2.26
  Bottom Layer w0.203: v1(85.868,106.595) 85.91,106.553 87.833,106.553 88.722,105.664 94.429,105.664 94.704,105.389 96.939,105.389 97.741,106.191 H2.26 ; R18.2 89.916,80.325 89.916,79.629 v1(89.916,78.867)
I2S_CLKOUT2: R16.2
LHPOUT: C21.2 J1.2 R9.1 | length 8.3
  Top Layer w0.203: C21.2 R9.1 82.296,160.02 83.727,161.451 J1.2
LHPOUT2: C22.2 J2.2 R10.1 | length 14.8
  Top Layer w0.203: C22.2 82.321,60.427 83.474,59.275 92.882,59.275 J2.2 93.574,58.614 94.234,59.275 R10.1
LIN1: FL1.1 R1.1 | length 1.9
  Top Layer w0.203: R1.1 96.52,153.01 FL1.1
LIN2: FL3.1 R2.1 | length 1.8
  Top Layer w0.203: FL3.1 96.571,59.08 R2.1
LOUT1: J3.2 U1.12 | length 23.8
  Top Layer w0.203: U1.12 93.091,130.867 98.718,125.24 J3.2@106.253,125.24
LOUT2: J7.2 U2.12 | length 28.3
  Top Layer w0.203: v1(92.888,71.349) 92.9,71.336 92.9,69.329 U2.12 ; v1(104.775,76.988) 106.223,78.435 106.223,82.855 105.613,83.464 105.613,84.836 106.223,85.446 106.466,85.689 J7.2
  Bottom Layer w0.203: v1(92.888,71.349) 98.521,76.981 104.534,76.981 104.54,76.988 v1(104.775,76.988)
NetC11_1: C11.1 U1.20 | length 2.6
  Top Layer w0.203: C11.1 91.135,149.069 U1.20
NetC11_2: C11.2 C15.2 R1.2 R3.2 | length 9
  Top Layer w0.203: C11.2 94.234,148.59 94.234,148.336 95.504,147.066 97.536,147.066 97.79,147.32 C15.2 97.82,148.112 R1.2
NetC12_1: C12.1 U2.20 | length 12.8
  Top Layer w0.203: U2.20 90.957,75.514 91.516,74.955 93.65,74.955 95.428,73.177 95.428,70.053 96.923,68.558 C12.1
NetC12_2: C12.2 C16.2 R2.2 R4.2 | length 5.2
  Top Layer w0.203: R2.2 97.866,60.812 97.866,63.83 97.917,63.881 C12.2
NetC17_1: C17.1 U1.19 | length 14.3
  Top Layer w0.203: U1.19 91.796,147.676 92.426,148.306 92.426,151.271 cw(c92.63,151.27) 92.485,151.413 97.731,156.659 ccw(c97.587,156.802) 97.79,156.802 C17.1
NetC17_2: C17.2 C19.2 R5.2 R7.2 | length 5.3
  Top Layer w0.203: C17.2 C19.2 97.82,163.352 R7.2 R5.2
NetC18_1: C18.1 U2.19 | length 10.6
  Top Layer w0.203: U2.19 91.618,80.975 92.075,81.432 95.834,81.432 96.139,81.128 96.743,81.128 97.257,80.614 C18.1
NetC18_2: C18.2 C20.2 R6.2 R8.2 | length 5.3
  Top Layer w0.203: C18.2 97.612,77.521 97.612,76.175 R8.2 97.841,74.473 C20.2 97.866,72.903 R6.2
NetC21_1: C21.1 U1.9 | length 23.8
  Top Layer w0.203: C21.1 82.296,150.441 83.419,151.564 83.469,151.564 84.305,152.4 v1(91.186,152.4) ; U1.9 91.135,142.844 91.491,143.199 v1(91.491,143.307)
  Bottom Layer w0.203: 91.186,143.624 v1@91.491,143.319 ; 91.186,150.47 91.186,150.317 ; v1(91.186,152.4) 91.186,150.317 ; v1(91.491,143.307) v1@91.491,143.319 ; 91.186,150.317 91.491,150.012 v1@91.491,143.319
NetC22_1: C22.1 U2.9 | length 14.5
  Top Layer w0.203: C22.1 82.855,65.994 82.855,64.897 83.261,64.491 90.246,64.491 90.957,65.202 U2.9
NetC23_1: C23.1 U1.10 | length 16.6
  Top Layer w0.203: C23.1 87.861,150.876 v1(91.791,150.876) ; U1.10 91.796,142.545 92.151,142.9 v1(92.151,144.247)
  Bottom Layer w0.203: v1(91.791,150.876) 91.791,150.769 92.151,150.408 v1(92.151,144.247)
NetC24_1: C24.1 U2.10 | length 23.4
  Top Layer w0.203: C24.1 82.347,57.175 80.264,59.257 80.264,61.824 80.899,62.459 90.195,62.459 91.872,64.135 91.872,68.047 91.618,68.301 U2.10
NetC25_1: C25.1 C26.1 U1.16 | length 5.7
  Top Layer w0.203: U1.16 93.751,145.517 93.98,145.288 94.742,145.288 95.69,146.236 C25.1 97.35,146.236 C26.1
NetC27_1: C27.1 C28.1 U2.16 | length 5.3
  Top Layer w0.203: v1(92.558,78.943) 92.558,79.731 C28.1 93.506,79.849 C27.1 93.515,78.808 93.515,77.986 v1(93.523,77.978) 93.574,77.927 U2.16
NetC29_1: C29.1 U2.26 | length 3.8
  Top Layer w0.203: U2.26 87.071,80.01 C29.1
NetC30_1: C30.1 R17.1 U1.25 Y1.1 | length 10.2
  Top Layer w0.203: C30.1 82.901,140.635 Y1.1 R17.1@84.379,142.893 ; R17.1@84.413,142.85 86.563,142.85 87.884,144.17 U1.25
NetC31_1: C31.1 R17.2 U1.26 Y1.3 | length 11.5
  Top Layer w0.203: C31.1 81.255,145.147 Y1.3 81.201,144.199 81.382,144.018 R17.2@84.379,144.018 ; R17.2@84.434,144.043 86.614,144.043 87.249,144.678 U1.26
NetFL1_2: FL1.2 J4.2 | length 7.5
  Top Layer w0.203: FL1.2@98.718,153.18 J4.2@106.253,153.18
NetFL2_2: FL2.2 J6.2 | length 8.1
  Top Layer w0.203: FL2.2@98.427,168.274 cw(c98.718,168.056) 98.718,168.42 106.253,168.42 ccw(c106.253,168.623) 106.397,168.48 J6.2
NetFL3_2: FL3.2 J8.2 | length 7.5
  Top Layer w0.203: FL3.2@98.718,59.2 J8.2@106.253,59.2
NetFL4_2: FL4.2 J10.2 | length 8.9
  Top Layer w0.203: FL4.2 98.577,71.222 v1(99.593,71.222) ; v1(105.188,73.184) J10.2
  Bottom Layer w0.203: v1(99.593,71.222) 100.279,71.907 103.911,71.907 v1(105.188,73.184)
NetR11_5: R11.5 U1.5 U1.7 | length 5.7
  Top Layer w0.203: U1.5 88.544,140.233 88.748,140.437 89.687,140.437 89.84,140.284 89.84,138.146 89.643,137.949 R11.5
NetR11_6: R11.6 U1.6 | length 2.2
  Top Layer w0.203: R11.6 88.843,137.814 89.205,138.176 U1.6
NetR11_7: R11.7 U1.4 | length 2.1
  Top Layer w0.203: U1.4 87.884,138.201 88.043,138.043 R11.7
NetR11_8: R11.8 U1.3 | length 2.1
  Top Layer w0.203: R11.8 87.246,137.124 87.246,139.189 U1.3
NetR12_5: R12.5 U2.3 | length 8
  Top Layer w0.203: R12.5 81.782,72.726 83.261,71.247 86.157,71.247 87.071,70.333 U2.3
NetR12_6: R12.6 U2.4 | length 7.9
  Top Layer w0.203: R12.6 82.588,73.464 82.588,72.835 83.591,71.831 86.335,71.831 87.706,70.46 U2.4
NetR12_7: R12.7 U2.6 | length 8.3
  Top Layer w0.203: R12.7 83.382,72.89 83.78,72.492 86.798,72.492 89.027,70.263 U2.6
NetR12_8: R12.8 U2.5 U2.7 | length 11
  Top Layer w0.203: R12.8 86.473,73.47 89.662,70.282 U2.7 89.662,68.402 89.459,68.199 88.587,68.199 88.387,68.398 88.387,69.296 U2.5
NetR15_1: R15.1 U1.2 | length 2.5
  Top Layer w0.203: R15.1 86.182,137.566 86.589,137.973 U1.2
NetR15_2: R15.2 U2.25 | length 60.7
  Top Layer w0.203: R15.2 86.182,135.009 86.03,134.856 86.03,125.501 86.487,125.044 86.487,85.496 88.824,83.16 88.824,79.578 87.725,78.479 87.725,76.701 U2.25
NetR16_1: R16.1 U2.2 | length 8.9
  Top Layer w0.203: R16.1 80.416,72.923 82.499,70.841 85.954,70.841 86.411,70.383 U2.2
RHPOUT: C23.2 J1.5 R13.1 | length 15.8
  Top Layer w0.203: R13.1 90.909,156.441 C23.2 87.376,158.242 88.646,159.512 89.408,159.512 93.542,163.646 J1.5
RHPOUT2: C24.2 J2.5 R14.1 | length 9
  Top Layer w0.203: C24.2 82.347,53.01 83.617,54.28 86.308,54.28 J2.5 85.852,55.004 R14.1@85.852,56.525
RIN1: FL2.1 R5.1 | length 1.9
  Top Layer w0.203: R5.1 96.545,166.395 FL2.1
RIN2: FL4.1 R6.1 | length 1.8
  Top Layer w0.203: FL4.1 96.596,71.12 R6.1
ROUT1: J5.2 U1.13 | length 16.4
  Top Layer w0.203: U1.13 93.751,137.541 94.082,137.211 97.079,137.211 100.348,140.48 104.071,140.48 105.156,139.395 106.355,139.395 J5.2
ROUT2: J9.2 U2.13 | length 43.7
  Top Layer w0.203: U2.13 93.574,70.282 94.022,70.73 94.352,70.73 v1(94.412,70.79) ; v1(104.699,74.498) 104.699,75.971 104.165,76.505 104.165,77.47 105.715,79.019 105.715,82.728 104.851,83.591 104.851,91.034 105.867,92.05 105.867,100.152 106.466,100.751 J9.2
  Bottom Layer w0.203: v1(94.412,70.79) 94.477,70.79 98.135,74.447 104.648,74.447 v1(104.699,74.498)
SAI1_FS_A: H1.16 R11.4 R12.1 | length 71.7
  Top Layer w0.203: H1.16 78.448,131.581 84.192,131.581 v1(84.201,131.572) 84.811,130.962 84.811,115.646 84.182,115.017 R12.1 ; v1(89.637,132.156) 89.64,132.159 89.64,135.418 R11.4
  Bottom Layer w0.203: v1(84.201,131.572) 85.779,131.572 85.876,131.475 88.956,131.475 v1(89.637,132.156)
SAI1_SCK_A: H1.17 R11.1 R12.4 | length 70.4
  Top Layer w0.203: H1.17 78.467,129.079 v1@84.121,129.079 ; R12.4 81.782,85.719 83.775,87.712 83.775,118.942 83.058,119.659 83.058,128.016 v1@84.121,129.079 ; v1(84.15,129.108) v1@84.121,129.079 ; v1(86.817,129.083) 87.243,129.508 R11.1
  Bottom Layer w0.203: v1(84.15,129.108) 84.163,129.095 86.804,129.095 v1(86.817,129.083)
SAI1_SD_A: H1.28 R11.3 | length 43.9
  Top Layer w0.203: H1.28 78.455,101.127 83.093,101.127 v1(83.109,101.143) ; v1(87.655,101.473) 87.73,101.548 87.73,128.751 88.843,129.864 R11.3
  Bottom Layer w0.203: v1(83.109,101.143) 83.134,101.117 83.956,101.117 84.348,101.51 87.618,101.51 v1(87.655,101.473)
SAI1_SD_B: H1.15 R11.2 | length 12.1
  Top Layer w0.203: H1.15 81.998,134.131 83.064,133.064 v1(84.22,133.064) ; v1(88.036,133.655) 88.04,133.658 88.04,135.418 R11.2
  Bottom Layer w0.203: v1(84.22,133.064) 87.446,133.064 v1(88.036,133.655)
SAI2_SD_A: H2.28 R12.2 | length 35.7
  Top Layer w0.203: v1(83.312,85.979) 82.575,85.242 82.575,77.665 83.382,76.859 R12.2
  Bottom Layer w0.203: v1(83.312,85.979) 98.444,101.111 H2.28
SAI2_SD_B: H1.33 R12.3 | length 15.8
  Top Layer w0.203: H1.33 78.539,88.411 81.153,85.796 v1(81.153,76.81) ; v1(82.575,76.81) 82.579,76.806 82.579,75.174 R12.3
  Bottom Layer w0.203: v1(81.153,76.81) v1(82.575,76.81)
pads on no net: H1.2 H1.3 H1.4 H1.5 H1.6 H1.7 H1.8 H1.9 H1.10 H1.11 H1.12 H1.13 H1.14 H1.18 H1.19 H1.20 H1.21 H1.22 H1.27 H1.29 H1.30 H1.31 H1.32 H1.34 H1.35 H1.36 H1.37 H1.38 H1.39 H1.40 H1.41 H1.42 H1.43 H1.44 H1.45 H1.46 H1.47 H2.2 H2.3 H2.4 H2.5 H2.6 H2.7 H2.8 H2.9 H2.10 H2.11 H2.12 H2.13 H2.14 H2.15 H2.16 H2.17 H2.18 H2.19 H2.20 H2.21 H2.22 H2.23 H2.24 H2.25 H2.29 H2.30 H2.31 H2.32 H2.33 H2.34 H2.35 H2.36 H2.37 H2.38 H2.39 H2.40 H2.41 H2.42 H2.43 H2.44 H2.45 H2.46 H2.47 J1.6 J1.257 J1.258 J2.6 J2.257 J2.258 J3.5 J3.6 J3.257 J3.258 J4.5 J4.6 J4.257 J4.258 J5.5 J5.6 J5.257 J5.258 J6.5 J6.6 J6.257 J6.258 J7.5 J7.6 J7.257 J7.258 J8.5 J8.6 J8.257 J8.258 J9.5 J9.6 J9.257 J9.258 J10.5 J10.6 J10.257 J10.258 U1.17 U1.18 U2.17 U2.18

## Polygon pours and split planes (outlines as drawn)
GND_A on Bottom Layer "GND_A_L02_P004" (solid, remove dead copper, pour order 4): 76.54,171.086 76.556,171.071 76.556,48.92 116.205,48.92 116.205,171.094
GND on Bottom Layer "GND_L02_P003" (solid, remove dead copper, pour order 3): 76.413,171.213 76.429,171.198 76.429,49.047 116.078,49.047 116.078,171.221
+3V3_D on Bottom Layer "+3V3_D_L02_P001" (solid, remove dead copper, pour order 1): 78.455,110.404 78.455,113.727 79.18,114.452 81.534,114.452 83.998,111.989 83.998,82.194 84.887,81.305 84.887,80.162 83.845,80.162 81.3,82.708 81.3,108.769 79.68,110.388
+3V3_D on Bottom Layer "+3V3_D_L02_P000" (solid, remove dead copper, pour order 0): 79.686,113.938 81.045,113.938 83.134,116.027 83.134,136.754 86.589,140.208 86.589,141.249 86.436,141.402 85.141,141.402 81.559,137.82 81.559,117.907 77.775,114.122
GND on Top Layer "GND_L01_P002" (solid, remove dead copper, pour order 2): 76.413,171.213 76.429,171.198 76.429,49.047 116.078,49.047 116.078,171.221

## Keep-outs
Keep-Out Layer:
  lines w0.05: 104.115,172.339 104.115,169.062 103.226,168.173 100.051,168.173 99.06,169.164 85.115,169.164 83.566,167.615 83.566,162.941 80.035,159.41 80.035,148.869 89.586,148.869 90.449,148.006 90.449,145.034 89.916,144.501 89.916,137.338 91.77,135.484 91.77,125.578 94.793,122.555 102.337,122.555 104.064,120.828 104.064,94.107 103.2,93.243 103.2,78.461 102.972,78.232 100.101,78.232 96.037,82.296 91.999,82.296 90.322,80.62 90.322,71.755 90.983,71.095 90.983,70.587 90.297,69.901 90.297,67.996 88.392,66.091 85.446,66.091 83.083,68.453 80.874,68.453 80.137,67.716 80.137,53.315 81.966,51.486 97.841,51.486 99.238,52.883 102.997,52.883 107.95,47.93
  lines w0.152: 103.657,116.205 103.657,119.507 103.988,119.837 104.013,119.837 ; 103.708,94.056 103.708,97.231 103.911,97.434 103.911,97.46

## Silkscreen, mask and mechanical layers (free items; w line width, h text height)
Top Overlay:
  lines w0.152: 104.775,89.59 114.935,89.59 ; 104.775,104.222 114.935,104.222 ; 105.41,114.355 115.57,114.355 ; 105.41,128.987 115.57,128.987 ; 106.045,61.595 104.775,60.325 114.935,60.325 ; 106.045,76.227 104.775,74.957 114.935,74.957 ; 106.68,144.835 105.41,143.565 115.57,143.565 ; 106.68,159.467 105.41,158.197 115.57,158.197 ; 113.583,90.86 114.853,89.59 ; 113.583,105.492 114.853,104.222 ; 114.218,115.625 115.488,114.355 ; 114.218,130.257 115.488,128.987
  text "GND" at 96.571,169.139 h0.76
  text "GND" at 80.061,169.062 h0.76
  text "PD6 /  / PD7" at 80.086,161.62 h0.76
  text "In1R" at 108.839,158.451 h1.52
  text "In1L" at 108.839,143.819 h1.52
  text "Out1R" at 106.934,129.159 h1.52
  text "PE2 /  / PE3 /  / PE4 /  / PE5 /  / PE6 /  / VBAT /  / PC13" at 80.086,120.879 h0.76
  text "PA13 /  / PA12 /  / PA11 /  / PA10 /  / PA9 /  / PA8 /  / PC9 /  / PC8" at 96.52,118.237 h0.76
  text "PC14 / OSC / 32_IN" at 79.781,117.45 h0.58
  text "OUT" at 79.527,116.154 h0.58 r315
  text "Out1L" at 106.934,114.554 h1.52
  text "+" at 79.934,113.563 h0.58
  text "+" at 79.934,110.998 h0.58
  text "G" at 79.807,108.407 h0.58
  text "C7 /  / C6 /  / D15 /  / D14 /  / D13" at 97.663,106.197 h0.64
  text "G" at 79.832,105.994 h0.58
  text "Out2R" at 106.299,104.394 h1.52
  text "PC0" at 79.883,102.946 h0.58
  text "Out2L" at 106.299,89.789 h1.52
  text "PD12 /  / PD11 /  / PD10 /  / PD9 /  / PD8 /  / PB15 /  / PB14 /  / PB13 /  / PB12" at 96.571,82.372 h0.76
  text "In2R" at 108.204,75.211 h1.52
  text "In2L" at 108.204,60.579 h1.52
  text "PC1 /  / PC2 /  / PC3 /  / VREF+ /  / VDDA /  / PA0 /  / PA1 /  / PA2 /  / PA3 /  / PA4 /  / PA5 /  / PA6 /  / PA7 /  / PC4 /  / PC5 /  / PB0 /  / PB1 /  / PB2" at 79.908,57.506 h0.75
  text "PE8 /  / PE7" at 96.495,54.61 h0.76
  text "GND" at 79.908,49.835 h0.76
  text "GND" at 96.52,49.835 h0.76
LAYOUT:
  lines w0.05: 74,48.914 106,48.914 106,171.086 74,171.086 ; 74,110 106,110 ; 74.78,49.192 75.899,50.311 ; 74.78,51.429 75.899,50.311 ; 74.78,168.572 75.899,169.691 ; 74.78,170.809 75.899,169.691 ; 76.54,48.914 76.54,171.086 ; 77.017,49.192 75.899,50.311 ; 77.017,51.429 75.899,50.311 ; 77.017,168.572 75.899,169.691 ; 77.017,170.809 75.899,169.691 ; 77.32,49.192 78.439,50.311 ; 77.32,51.429 78.439,50.311 ; 77.32,168.572 78.439,169.691 ; 77.32,170.809 78.439,169.691 ; 79.557,49.192 78.439,50.311 ; 79.557,51.429 78.439,50.311 ; 79.557,168.572 78.439,169.691 ; 79.557,170.809 78.439,169.691 ; 79.709,51.847 79.709,168.154 ; 88.882,108.882 90,110 ; 88.882,111.118 90,110 ; 90,48.914 90,110 ; 90,171.086 90,110 ; 91.118,108.882 90,110 ; 91.118,111.118 90,110 ; 100.18,49.192 101.299,50.311 ; 100.18,51.429 101.299,50.311 ; 100.18,168.572 101.299,169.691 ; 100.18,170.809 101.299,169.691 ; 100.291,51.846 100.291,168.153 ; 102.417,49.192 101.299,50.311 ; 102.417,51.429 101.299,50.311 ; 102.417,168.572 101.299,169.691 ; 102.417,170.809 101.299,169.691 ; 102.72,49.192 103.839,50.311 ; 102.72,51.429 103.839,50.311 ; 102.72,168.572 103.839,169.691 ; 102.72,170.809 103.839,169.691 ; 104.957,49.192 103.839,50.311 ; 104.957,51.429 103.839,50.311 ; 104.957,168.572 103.839,169.691 ; 104.957,170.809 103.839,169.691
OUTLINE:
  the board outline again, w0.05